# Altium PCB IMX6.PcbDoc (part 3 of 3)
Units mil, origin at the board's own origin, x right, y up, seen from the top; angles counter-clockwise.
Board outline 7950 x 5550 mil, 4 copper layers (Top Layer, GND, VCC, Bottom Layer), stack 30.634 mil thick; 256 components, 328 nets, 1056 pads, 386 vias.
Unrouted connection lines stored in the file: 1.
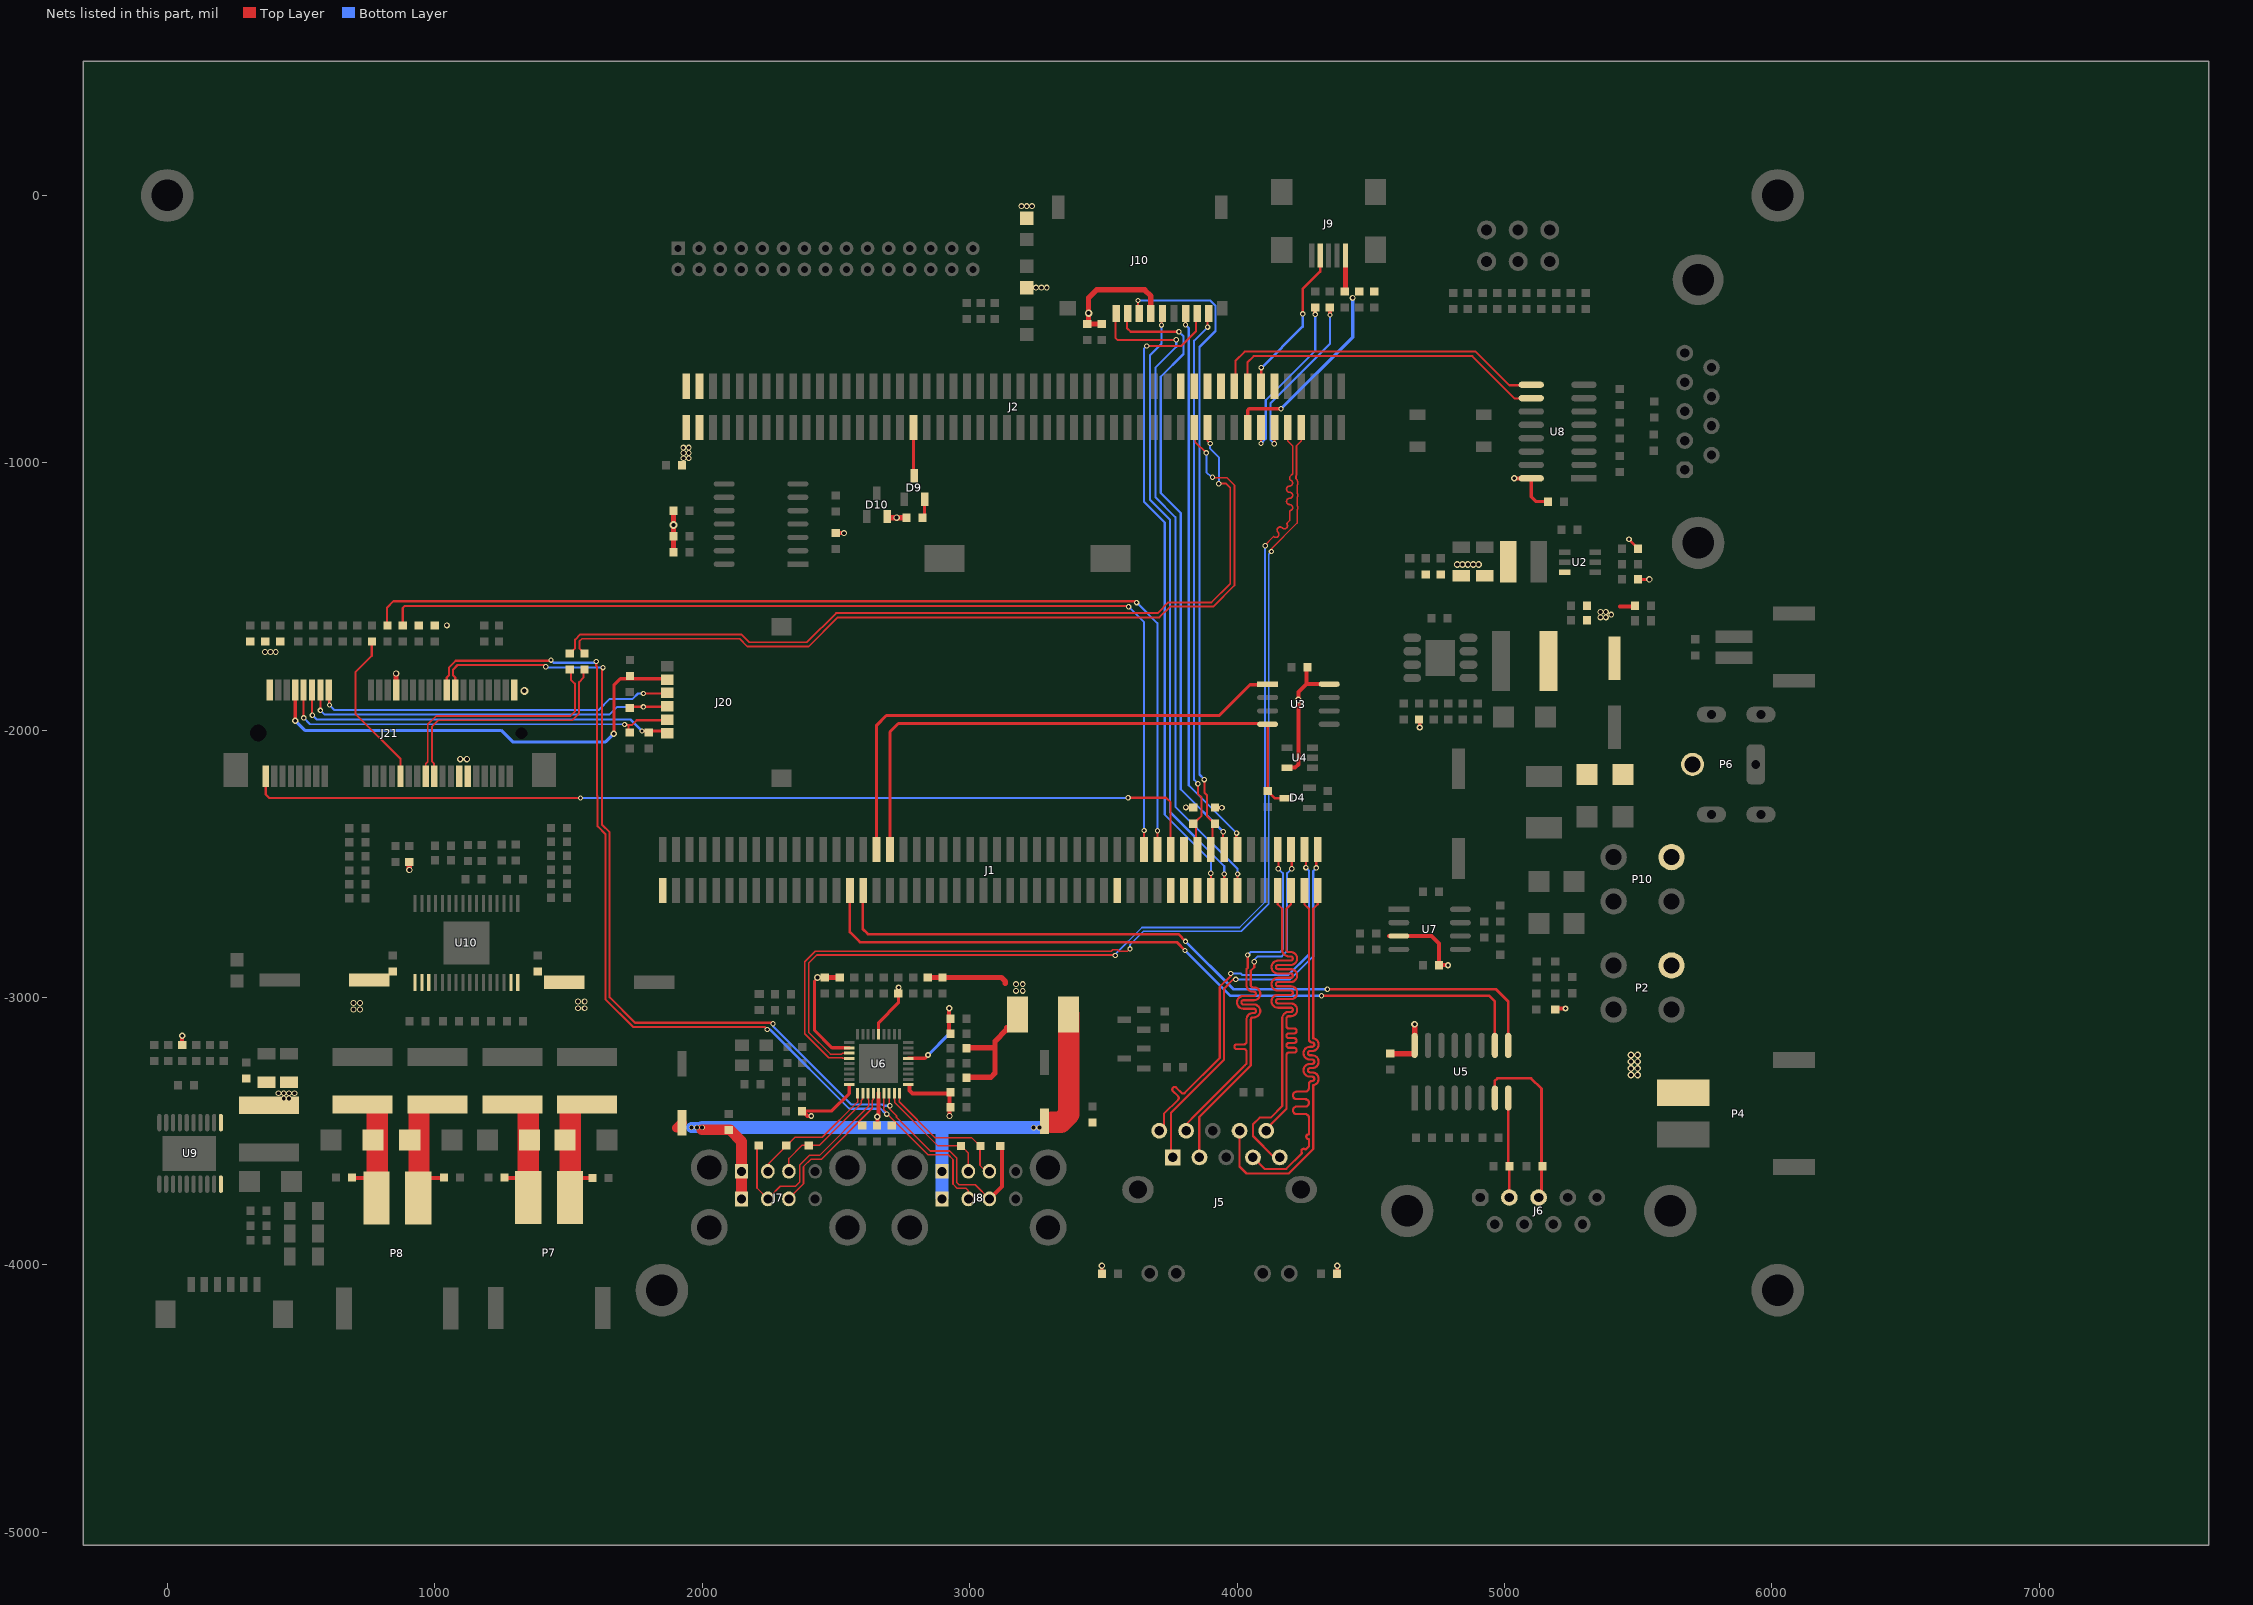
[diagram p5: the nets of this part, all layers, seen from the top]

## Via types
v1: diameter 20, hole 12, Top Layer to Bottom Layer, 137 vias
v2: diameter 22, hole 14, Top Layer to Bottom Layer, 44 vias
v3: diameter 23, hole 13, Top Layer to Bottom Layer, 35 vias
v4: diameter 24, hole 14, Top Layer to Bottom Layer, 34 vias
v5: diameter 25, hole 14, Top Layer to Bottom Layer, 26 vias
v6: diameter 22, hole 13, Top Layer to Bottom Layer, 22 vias
v7: diameter 22, hole 12, Top Layer to Bottom Layer, 19 vias
v8: diameter 30, hole 22, Top Layer to Bottom Layer, tented top, 15 vias
v9: diameter 25, hole 15, Top Layer to Bottom Layer, 11 vias
v10: diameter 22, hole 18, Top Layer to Bottom Layer, 6 vias
v11: diameter 25, hole 16, Top Layer to Bottom Layer, 5 vias
v12: diameter 24, hole 13, Top Layer to Bottom Layer, 5 vias
v13: diameter 20, hole 15, Top Layer to Bottom Layer, 5 vias
v14: diameter 26, hole 15, Top Layer to Bottom Layer, 4 vias
v15: diameter 18, hole 10, Top Layer to Bottom Layer, 4 vias
v16: diameter 20, hole 14, Top Layer to Bottom Layer, 4 vias
v17: diameter 28, hole 16, Top Layer to Bottom Layer, 3 vias
v18: diameter 28, hole 15, Top Layer to Bottom Layer, 2 vias
v19: diameter 30, hole 15, Top Layer to Bottom Layer, 2 vias
v20: diameter 32, hole 16, Top Layer to Bottom Layer, 1 vias
v21: diameter 26, hole 14, Top Layer to Bottom Layer, 1 vias
v22: diameter 30, hole 16, Top Layer to Bottom Layer, 1 vias

## Nets (pads, with @x,y where several pads share a name; then routed paths per layer and width w, separated by ;. In a path a pad name is that pad's centre, name@x,y a point inside that pad or via, vN(x,y) a via of type N, cw(c..) or ccw(c..) an arc to the next point about the centre after c; other vN are vias at no path point) (continued)
PCIE_RXO_P: C117.2 J21.25 | length 576.3
  Top Layer w8: C117.2@763.48,-1668 763.48,-1722 702.48,-1783 702.48,-1939 871.48,-2108 J21.25@871.48,-2149
PCIE_TX_N: C118.1 J2.79 | length 3256.5
  Top Layer w7: C118.1@1504.48,-1713 1523.98,-1693.5 1523.98,-1661.37 1543.35,-1642 2146.11,-1642 2175.11,-1671 2391.48,-1671 2500.48,-1562 3702.85,-1562 3742.85,-1522 3904.48,-1522 3974.48,-1452 3974.48,-1093 3959.48,-1078 v1(3931.48,-1078) ; J2.79@3889.8,-867.49 3889.8,-918.73 3899.06,-928 v1(3899.48,-928)
  Bottom Layer w7: v1(3899.48,-928) 3899.48,-946.89 3932.32,-979.73 v1@3932.32,-1077
PCIE_TX_P: C119.1 J2.77 | length 3300.3
  Top Layer w7: C119.1@1559.48,-1713 1539.98,-1693.5 1539.98,-1668 1549.98,-1658 2139.48,-1658 2168.48,-1687 2398.11,-1687 2507.11,-1578 3709.48,-1578 3749.48,-1538 3911.11,-1538 3990.48,-1458.63 3990.48,-1084 3962.48,-1056 v1@3902.48,-1056 ; J2.77@3839.8,-867.49 3843.8,-871.49 3843.8,-922.31 v1(3884.48,-963)
  Bottom Layer w7: v1(3884.48,-963) 3885.48,-964 3885.48,-1035.31 v1@3903.17,-1053
  other v1: 3908.48,-1054
PCIE_TXO_N: C118.2 J21.31 | length 922.6
  Top Layer w7: J21.31@965.47,-2169.42 965.47,-2126.05 973.21,-2118.3 973.21,-1978.64 1004.85,-1947 1506.85,-1947 1523.17,-1930.69 1523.17,-1825.69 1508.48,-1811 C118.2@1508.48,-1778
PCIE_TXO_P: C119.2 J21.33 | length 919.2
  Top Layer w7: J21.33@996.96,-2169.42 996.96,-2126.05 989.21,-2118.3 989.21,-1985.27 1011.48,-1963 1513.48,-1963 1539.17,-1937.31 1539.17,-1820.31 1555.48,-1804 C119.2@1555.48,-1782
POR_B: D9.3 J2.35 | length 187.5
  Top Layer w12: D9.3@2789.8,-1055 J2.35@2789.8,-867.49
PWM1_OUT: J1.1
RESET_B: D9.2 R93.1 | length 61.1
  Top Layer w12: R93.1@2830.48,-1205 D9.2@2830.48,-1143.89
SATA_RX_N: J2.82
SATA_RX_P: J2.80
SATA_TX_N: J2.76
SATA_TX_P: J2.78
SD2_CD: J1.82 J10.9 R36.1 | length 2036.3
  Top Layer w8: J1.82@3846,-2448.02 R36.1@3846,-2351.8 ; R36.1@3849.48,-2338 3867.48,-2320 3867.48,-2252 3853.48,-2238 v1(3853.48,-2200) ; v1(3889.98,-492.5) J10.9@3889.98,-437.89
  Bottom Layer w8: v1(3853.48,-2200) 3839.48,-2186 3839.48,-543 v1(3889.98,-492.5)
SD2_CLK: J1.85 J10.5 | length 2295.4
  Top Layer w8: v1(3717.48,-485) J10.5@3717.48,-437.17 ; J1.85@3952,-2599.77 v1(3952,-2538)
  Bottom Layer w8: v1(3717.48,-485) 3717.48,-555 3674.48,-598 3674.48,-1138 3749.48,-1213 3749.48,-2306 3952,-2508.52 v1(3952,-2538)
SD2_CMD: J1.84 J10.3 R35.1 | length 2413.6
  Top Layer w8: J10.3@3627.48,-432.72 3629.48,-430.72 v1(3629.48,-393) ; v1@3878.48,-2187 3878.48,-2234 3887.48,-2243 3887.48,-2322 3908,-2342.52 J1.84@3908,-2445.23
  Bottom Layer w8: v1(3629.48,-393) 3899.48,-393 3919.48,-413 3919.48,-507 3859.48,-567 3859.48,-2166 3877.48,-2184 v1(3877.48,-2185)
SD2_DATA0: J1.88 J10.7 | length 2089.9
  Top Layer w8: J10.7@3804.62,-436.64 3807.48,-439.5 v1(3807.48,-484) ; J1.88@3997,-2441.23 v1@3997,-2380
  Bottom Layer w8: v1(3807.48,-484) 3819.48,-496 3819.48,-2206 v1(3998.48,-2385)
SD2_DATA1: J1.83 J10.8 | length 2400.9
  Top Layer w8: v1(3662.48,-563) 3791.48,-563 3846.48,-508 J10.8@3846.48,-459 ; J1.83@3902,-2599.77 v1(3902,-2535.52)
  Bottom Layer w8: v1(3662.48,-563) 3651.48,-574 3651.48,-1145 3729.48,-1223 3729.48,-2316 3902,-2488.52 v1(3902,-2535.52)
SD2_DATA2: J1.87 J10.1 | length 2546
  Top Layer w8: J10.1@3544.78,-436.64 3544.78,-532.3 3552.48,-540 v1(3772.48,-540) ; J1.87@4002,-2599.77 v1(4002,-2538)
  Bottom Layer w8: v1(3772.48,-540) 3772.48,-565.87 3694.48,-643.87 3694.48,-1128 3769.48,-1203 3769.48,-2286 4002,-2518.52 v1(4002,-2538)
SD2_DATA3: J1.86 J10.2 | length 2338.3
  Top Layer w8: J10.2@3588.09,-436.64 3588.09,-495.61 3602.48,-510 v1(3782.48,-510) ; J1.86@3947,-2446.23 v1@3947,-2380
  Bottom Layer w8: v1(3782.48,-510) 3799.48,-527 3799.48,-593 3714.48,-678 3714.48,-1113 3789.48,-1188 3789.48,-2221 v1@3950.98,-2382.5
  other v1: 3948.48,-2380
SD3_CMD: J1.77
SD3_DATA0: J1.80
SD3_DATA1: J1.74 R105.1 | length 3692.2
  Top Layer w8: R105.1@879.48,-1608 879.48,-1543 887.48,-1535 3591.48,-1535 v1@3598.48,-1542 ; J1.74@3652.48,-2415 v1@3652.48,-2374
  Bottom Layer w8: v1(3594.48,-1538) 3652.48,-1596 v1(3652.48,-2375)
SD3_DATA2: J1.76 R104.1 | length 3799.4
  Top Layer w8: R104.1@820.48,-1608 820.48,-1542 844.48,-1518 v1@3619.48,-1518 ; J1.76@3702.48,-2416 v1@3702.48,-2375
  Bottom Layer w8: v1@3625.98,-1523.5 3701.98,-1599.5 v1@3701.98,-2375.5
  other v1: 3702.48,-2376 3624.48,-1523
SD3_DATA4: J1.79
SD3_DATA5: J1.78 J21.1 | length 3610.4
  Top Layer w8: J21.1@367.04,-2182 367.04,-2240.56 380.04,-2253.56 v1(1544.48,-2253.56) ; v1(3592.48,-2253) 3734.48,-2253 3751.48,-2270 J1.78@3751.48,-2424
  Bottom Layer w8: v1(1544.48,-2253.56) v1@3593.48,-2253.56
SD3_DATA6: J1.81
SD3_DATA7: J1.69
SPEAK1+: C76.2 D14.K L9.2 P8.1 | length 402
  Top Layer w15: P8.1@975,-3675 C76.2@1037,-3675
  Top Layer w80: P8.1@940.39,-3748 L9.2@940.39,-3408
SPEAK1-: C80.1 D15.K L10.2 P8.2 | length 381
  Top Layer w15: C80.1@695,-3675 P8.2@766,-3675
  Top Layer w80: P8.2@784.48,-3718 L10.2@784.48,-3408
SPEAK2+: C70.2 D12.K L7.2 P7.1 | length 372
  Top Layer w15: P7.1@1528,-3675 C70.2@1590,-3675
  Top Layer w80: P7.1@1505.39,-3718 L7.2@1505.39,-3408
SPEAK2-: C72.1 D13.K L8.2 P7.2 | length 368
  Top Layer w15: C72.1@1265,-3675 P7.2@1328,-3675
  Top Layer w80: P7.2@1349.48,-3718 L8.2@1349.48,-3413
TRX0_N: J1.100 J5.2 | length 1485.5
  Top Layer w8: J5.2@3752.48,-3591 3752.48,-3431.63 3951.48,-3232.63 3951.48,-2966.81 3986.29,-2932 v1(3995.48,-2932) ; v1(4296.48,-2515) J1.100@4296.48,-2455.23
  Bottom Layer w8: v1(3995.48,-2932) 4198.61,-2932 4284.98,-2845.63 4284.98,-2526.5 v1(4296.48,-2515)
TRX0_P: J1.98 J5.1 | length 1478.4
  Top Layer w8: J5.1@3726.48,-3498 3726.48,-3435 3779.48,-3382 ccw(c3773.12,-3375.64) 3779.48,-3369.27 3760.3,-3350.09 cw(c3766.66,-3343.73) 3760.3,-3337.36 cw(c3766.66,-3343.73) 3773.03,-3337.36 3792.21,-3356.54 ccw(c3798.57,-3350.18) 3804.94,-3356.54 3935.48,-3226 3935.48,-2960.19 3976.48,-2919.19 v1(3976.48,-2910) ; v1@4257.42,-2514.74 J1.98@4257.42,-2461
  Bottom Layer w8: v1(3976.48,-2910) 4013.48,-2910 4019.48,-2916 4191.98,-2916 4268.98,-2839 4268.98,-2525.5 v1@4256.98,-2513.5 ; v1@4256.48,-2514 v1(4257.48,-2514)
TRX1_N: J1.96 J5.4 | length 1506.9
  Top Layer w8: J5.4@3859.48,-3598 3858.48,-3597 3858.48,-3447 4051.48,-3254 4051.48,-3082 cw(c4059.48,-3082) 4059.48,-3074 4062.95,-3074 ccw(c4062.95,-3050) 4086.95,-3050 ccw(c4062.95,-3050) 4062.95,-3026 4024.01,-3026 cw(c4024.01,-3018) 4024.01,-3010 4062.95,-3010 ccw(c4062.95,-2986) 4086.95,-2986 ccw(c4062.95,-2986) 4062.95,-2962 4059.48,-2962 cw(c4059.48,-2954) 4051.48,-2954 4051.48,-2900 4064.48,-2887 v1(4064.48,-2866) ; J1.96@4202,-2446.23 4204.48,-2448.71 v1(4204.48,-2518)
  Bottom Layer w8: v1(4064.48,-2866) 4064.48,-2859 4077.48,-2846 4167.11,-2846 4187.48,-2825.63 4187.48,-2535 v1(4204.48,-2518)
TRX1_P: J1.94 J5.3 | length 1510
  Top Layer w8: J5.3@3809.48,-3498 3809.48,-3473.37 3847.17,-3435.69 4020.67,-3262.19 4029.12,-3253.74 4035.48,-3247.37 4035.48,-3202 ccw(c4026.48,-3202) 4026.48,-3193 3999.07,-3193 cw(c3999.07,-3184) 3990.07,-3184 cw(c3999.07,-3184) 3999.07,-3175 4026.48,-3175 ccw(c4026.48,-3166) 4035.48,-3166 4035.48,-3157 4035.48,-3148 4035.48,-3082 cw(c4059.48,-3082) 4059.48,-3058 4062.95,-3058 ccw(c4062.95,-3050) 4070.95,-3050 ccw(c4062.95,-3050) 4062.95,-3042 4024.01,-3042 cw(c4024.01,-3018) 4024.01,-2994 4062.95,-2994 ccw(c4062.95,-2986) 4070.95,-2986 ccw(c4062.95,-2986) 4062.95,-2978 4059.48,-2978 cw(c4059.48,-2954) 4035.48,-2954 4035.48,-2893.37 4040.17,-2888.69 4040.17,-2841.69 v1(4039.48,-2841) ; J1.94@4152,-2446.23 4154.48,-2448.71 v1(4154.48,-2518) v1@4152.53,-2518
  Bottom Layer w8: v1(4039.48,-2841) 4050.48,-2830 4160.48,-2830 4171.48,-2819 4171.48,-2535 v1(4154.48,-2518)
TRX2_N: J1.97 J5.8 | length 1572.1
  Top Layer w8: J5.8@4059.48,-3598 4102.48,-3641 4184.48,-3641 4243.14,-3582.34 ccw(c4242.43,-3581.64) 4243.14,-3580.93 cw(c4249.5,-3574.57) 4243.14,-3568.2 cw(c4249.5,-3574.57) 4255.87,-3568.2 ccw(c4256.57,-3567.49) 4257.28,-3568.2 4269,-3556.48 4269,-3530.48 ccw(c4268,-3530.48) 4268,-3529.48 cw(c4268,-3520.48) 4259,-3520.48 cw(c4268,-3520.48) 4268,-3511.48 ccw(c4268,-3510.48) 4269,-3510.48 4269,-3450 ccw(c4255,-3450) 4255,-3436 4223,-3436 cw(c4223,-3422) 4209,-3422 cw(c4223,-3422) 4223,-3408 4255,-3408 ccw(c4255,-3394) 4269,-3394 ccw(c4255,-3394) 4255,-3380 4223,-3380 cw(c4223,-3366) 4209,-3366 cw(c4223,-3366) 4223,-3352 4255,-3352 ccw(c4255,-3338) 4269,-3338 4269,-3324 cw(c4281,-3324) 4281,-3312 ccw(c4281,-3304) 4289,-3304 ccw(c4281,-3304) 4281,-3296 4273,-3296 cw(c4273,-3272) 4273,-3248 4281,-3248 ccw(c4281,-3240) 4289,-3240 ccw(c4281,-3240) 4281,-3232 4273,-3232 cw(c4273,-3208) 4273,-3184 4281,-3184 ccw(c4281,-3176) 4289,-3176 ccw(c4281,-3176) 4281,-3168 cw(c4281,-3156) 4269,-3156 4269,-2800.6 ; J1.97@4252,-2599.77 4252,-2651.02 4269,-2668.02 4269,-2804
TRX2_P: J1.99 J5.7 | length 1554.4
  Top Layer w8: J5.7@4009.48,-3504 4009.48,-3632 4035.48,-3658 4193.48,-3658 4285,-3566.48 4285,-3327.66 ccw(c4281,-3304) 4305,-3304 ccw(c4281,-3304) 4281,-3280 4273,-3280 cw(c4273,-3272) 4273,-3264 4281,-3264 ccw(c4281,-3240) 4305,-3240 ccw(c4281,-3240) 4281,-3216 4273,-3216 cw(c4273,-3208) 4273,-3200 4281,-3200 ccw(c4281,-3176) 4305,-3176 ccw(c4281,-3176) 4285,-3152.34 4285,-2800.6 ; 4285,-2804 4285,-2668.02 4302,-2651.02 J1.99@4302,-2599.77
TRX3_N: J1.93 J5.10 | length 1568.3
  Top Layer w8: J5.10@4145.48,-3600 4141.48,-3600 4059.48,-3518 4059.48,-3474 4084.48,-3449 4125.48,-3449 4169,-3405.48 4169,-3078 cw(c4193,-3078) 4193,-3054 4200.89,-3054 ccw(c4200.89,-3046) 4208.89,-3046 ccw(c4200.89,-3046) 4200.89,-3038 4153.11,-3038 cw(c4153.11,-3014) 4153.11,-2990 4200.89,-2990 ccw(c4200.89,-2982) 4208.89,-2982 ccw(c4200.89,-2982) 4200.89,-2974 4153.11,-2974 cw(c4153.11,-2950) 4153.11,-2926 4200.89,-2926 ccw(c4200.89,-2918) 4208.89,-2918 ccw(c4200.89,-2918) 4200.89,-2910 4153.11,-2910 cw(c4153.11,-2886) 4153.11,-2862 4200.89,-2862 ccw(c4200.89,-2854) 4208.89,-2854 ccw(c4200.89,-2854) 4200.89,-2846 4193,-2846 cw(c4193,-2822) 4169,-2822 4169,-2668.02 4152,-2651.02 J1.93@4152,-2599.77
  Bottom Layer w8: J5.10@4159.48,-3598 J5.10@4164.48,-3598
TRX3_P: J1.95 J5.9 | length 1564.3
  Top Layer w8: J5.9@4106.48,-3494 4185,-3415.48 4185,-3276 4185,-3215 cw(c4194,-3215) 4194,-3206 4213.8,-3206 ccw(c4213.8,-3197) 4222.8,-3197 ccw(c4213.8,-3197) 4213.8,-3188 4194,-3188 cw(c4194,-3179) 4185,-3179 cw(c4194,-3179) 4194,-3170 4213.8,-3170 ccw(c4213.8,-3161) 4222.8,-3161 ccw(c4213.8,-3161) 4213.8,-3152 4194,-3152 cw(c4194,-3143) 4185,-3143 cw(c4194,-3143) 4194,-3134 4213.8,-3134 ccw(c4213.8,-3125) 4222.8,-3125 ccw(c4213.8,-3125) 4213.8,-3116 4194,-3116 cw(c4194,-3107) 4185,-3107 4185,-3078 cw(c4193,-3078) 4193,-3070 4200.89,-3070 ccw(c4200.89,-3046) 4224.89,-3046 ccw(c4200.89,-3046) 4200.89,-3022 4153.11,-3022 cw(c4153.11,-3014) 4153.11,-3006 4200.89,-3006 ccw(c4200.89,-2982) 4224.89,-2982 ccw(c4200.89,-2982) 4200.89,-2958 4153.11,-2958 cw(c4153.11,-2950) 4153.11,-2942 4200.89,-2942 ccw(c4200.89,-2918) 4224.89,-2918 ccw(c4200.89,-2918) 4200.89,-2894 4153.11,-2894 cw(c4153.11,-2886) 4153.11,-2878 4200.89,-2878 ccw(c4200.89,-2854) 4224.89,-2854 ccw(c4200.89,-2854) 4200.89,-2830 4193,-2830 cw(c4193,-2822) 4185,-2822 4185,-2668.02 4202,-2651.02 J1.95@4202,-2599.77
  Bottom Layer w8: J5.9@4109.48,-3499.47 J5.9@4109.48,-3498
U2_RXD: D20.1 J6.2 U5.8 | length 390.3
  Top Layer w10: D20.1@5014.39,-3629 U5.8@5014.39,-3375.76 ; D20.1@5018.39,-3630.91 5018.39,-3747.75 J6.2@5018.65,-3748 J6.2@5018.65,-3728.17
U2_TXD: D21.1 J6.3 U5.7 | length 631.7
  Top Layer w10: U5.7@4963.48,-3355 4963.48,-3313 4974.48,-3302 5099.48,-3302 5138.48,-3341 J6.3@5138.48,-3735
UART1_RX: J2.84 U8.9 | length 1277.5
  Top Layer w8: J2.84@3989.8,-713.94 3994.48,-718.63 3994.48,-618 4028.48,-584 4892.48,-584 5018.48,-710 U8.9@5098.48,-710
UART1_TX: J2.86 U8.10 | length 1227.9
  Top Layer w8: J2.86@4039.8,-713.94 4038.48,-715.26 4038.48,-625 4062.48,-601 4879.48,-601 5038.48,-760 U8.10@5098.48,-760
UART2_RX: J1.31 U5.9 | length 2834.9
  Top Layer w10: J1.31@2600,-2599.77 2600,-2743.52 2619.48,-2763 3780.48,-2763 v1(3807.48,-2790) ; v1(4338,-2969) 4969,-2969 5014.39,-3014.39 U5.9@5014.39,-3178.91
  Bottom Layer w10: v1(3807.48,-2790) 3986.48,-2969 v1(4338,-2969)
UART2_TX: J1.29 U5.10 | length 2840.2
  Top Layer w10: J1.29@2552,-2599.48 2552,-2755.52 2589.48,-2793 3774.48,-2793 v1(3805.48,-2824) ; v1@4315,-2993 4943,-2993 4964.39,-3014.39 U5.10@4964.39,-3178.91
  Bottom Layer w10: v1(3805.48,-2824) 3974.48,-2993 v1@4315,-2993
  other v1: 4316,-2993
UART3_RX: J1.34 U3.1 | length 1984
  Top Layer w12: J1.34@2652,-2446.23 2652,-1981.48 2688.48,-1945 3933.48,-1945 4048.48,-1830 U3.1@4108.48,-1830
UART3_TX: D4.3 J1.36 R18.2 U3.4 | length 2170
  Top Layer w10: U3.4@4114.48,-1978 R18.2@4114.48,-2228 4140.54,-2254.06 D4.3@4183.43,-2254.06
  Top Layer w12: J1.36@2702,-2446.23 2702,-2006.48 2733.48,-1975 U3.4@4089.48,-1975
UIM_CLK: D31.1 J20.6 J21.12 | length 1469
  Top Layer w8: v1@540.48,-1946 J21.12@540.48,-1831.36 ; J20.6@1863.92,-2003 J20.6@1868.92,-2008
  Top Layer w10: v1(1774.48,-2003) J20.6@1863.92,-2003
  Bottom Layer w8: v1@541.48,-1943 558.48,-1960 1731.48,-1960 v1(1774.48,-2003)
  other v1: 541.48,-1944
UIM_DATA: D30.2 J20.5 J21.10 | length 1493.1
  Top Layer w8: v1@508.48,-1957 J21.10@508.48,-1861.36 ; v1@1709.65,-1980.17 1737.31,-1980.17 1754.48,-1963 J20.5@1862.48,-1963 ; D30.2@1723.57,-2007.91 1723.57,-1981.08
  Bottom Layer w8: v1(509.48,-1954) 532.73,-1977.29 v1@1710.48,-1978.37
  other v1: 1709.48,-1979
UIM_PWR: C1.1 J20.2 J21.8 | length 1753.1
  Top Layer w8: J21.8@475.48,-1840 J21.8@475.71,-1846.64
  Top Layer w12: v12@477.48,-1966 J21.8@477.48,-1842 ; v12@1669.48,-2005 1669.48,-1832 1693.48,-1808 J20.2@1868.92,-1808
  Bottom Layer w12: v12(477.48,-1965) 513.48,-2001 1247.48,-2001 1290.48,-2044 1638.2,-2044 v12@1671.2,-2011
  other v12: 1669.48,-2013
UIM_RESET: D32.1 J20.4 J21.14 | length 1470.2
  Top Layer w8: v1@571.48,-1928 J21.14@571.48,-1824.36
  Top Layer w10: D32.1@1728.57,-1913 J20.4@1872.48,-1913
  Bottom Layer w8: v1(571.48,-1926) 587.48,-1942 1652.48,-1942 1681.48,-1913 v1@1775.48,-1913
  other v1: 1779.48,-1913
UIM_VPP: J20.3 J21.16 | length 1356.8
  Top Layer w8: v1@604.48,-1906 J21.16@604.48,-1825.36 ; v1(1779.48,-1863) J20.3@1858.48,-1863
  Bottom Layer w8: v1@606.48,-1907 624.48,-1925 1611.48,-1925 1653.48,-1883 1739.48,-1883 1759.48,-1863 v1@1770.48,-1863
  other v1: 605.48,-1906
USB_H1_D_N: J2.91 U6.30 | length 4188.4
  Top Layer w6: U6.30@2549.24,-3207.72 2525.56,-3207.72 2521.72,-3211.57 2479.05,-3211.57 2397.48,-3130 2397.48,-2872 2428.48,-2841 3535.17,-2841 3538.82,-2837.34 v1(3544.48,-2843) ; v1(4105.48,-1310) 4105.48,-1309 4104.48,-1308 4136.69,-1275.79 ccw(c4144.82,-1267.66) 4152.95,-1259.53 cw(c4161.09,-1251.4) 4169.22,-1243.26 ccw(c4177.35,-1235.13) 4185.48,-1227 4196.48,-1216 4196.48,-1179 ccw(c4196.48,-1167.5) 4196.48,-1156 cw(c4196.48,-1144.5) 4196.48,-1133 ccw(c4196.48,-1121.5) 4196.48,-1110 cw(c4196.48,-1098.5) 4196.48,-1087 ccw(c4196.48,-1075.5) 4196.48,-1064 4196.48,-1053 4208.48,-1041 4208.48,-937.42 4189.8,-918.73 J2.91@4189.8,-867.49
  Bottom Layer w6: v1(3544.48,-2843) 3544.48,-2838 3644.48,-2738 4009.48,-2738 4104.48,-2643 v1@4104.48,-1308
USB_H1_D_P: J2.93 U6.31 | length 4152.3
  Top Layer w6: U6.31@2549.24,-3227.41 2525.56,-3227.41 2523.72,-3225.57 2473.25,-3225.57 2383.48,-3135.8 2383.48,-2866.2 2422.68,-2827 3529.37,-2827 3535.37,-2821 3553.59,-2821 3559.59,-2827 3590.48,-2827 v1(3599.48,-2818) ; v1(4128.48,-1332) 4128.48,-1321 4224.48,-1225 4224.48,-1179.19 4224.79,-1178.88 4224.79,-1178.35 4225.34,-1177.8 4225.34,-1175.97 4225.77,-1175.54 4225.77,-1174.83 4225.89,-1174.7 4225.89,-1173.57 4226.33,-1173.13 4226.33,-1170.21 4226.56,-1169.98 4226.56,-1165.02 4226.33,-1164.79 4226.33,-1161.87 4225.89,-1161.44 4225.89,-1160.3 4225.77,-1160.17 4225.77,-1159.46 4225.34,-1159.03 4225.34,-1157.2 4224.79,-1156.65 4224.79,-1156.12 4224.48,-1155.81 4224.48,-1133.19 4224.79,-1132.88 4224.79,-1132.35 4225.34,-1131.8 4225.34,-1129.97 4225.77,-1129.54 4225.77,-1128.83 4225.89,-1128.7 4225.89,-1127.57 4226.33,-1127.13 4226.33,-1124.21 4226.56,-1123.98 4226.56,-1119.02 4226.33,-1118.79 4226.33,-1115.87 4225.89,-1115.44 4225.89,-1114.3 4225.77,-1114.17 4225.77,-1113.46 4225.34,-1113.03 4225.34,-1111.2 4224.79,-1110.65 4224.79,-1110.12 4224.48,-1109.81 4224.48,-1087.19 4224.79,-1086.88 4224.79,-1086.35 4225.34,-1085.8 4225.34,-1083.97 4225.77,-1083.54 4225.77,-1082.83 4225.89,-1082.7 4225.89,-1081.57 4226.33,-1081.13 4226.33,-1078.21 4226.56,-1077.98 4226.56,-1073.02 4226.33,-1072.79 4226.33,-1069.87 4225.89,-1069.44 4225.89,-1068.3 4225.77,-1068.17 4225.77,-1067.46 4225.34,-1067.03 4225.34,-1065.2 4224.79,-1064.65 4224.79,-1064.12 4220.48,-1059.81 4220.48,-1048.8 4222.48,-1046.8 4222.48,-936.05 4239.8,-918.73 J2.93@4239.8,-867.49
  Bottom Layer w6: v1(3599.48,-2818) 3599.48,-2802.8 3650.28,-2752 4015.28,-2752 4118.48,-2648.8 4118.48,-1342 v1(4128.48,-1332)
USB_H1_OC: J2.90
USB_OTG_D_N: J2.89 R33.2 | length 659.6
  Top Layer w8: v1(4139.48,-928.51) J2.89@4139.48,-878
  Top Layer w15: v1(4347.48,-447) R33.2@4347.48,-420
  Bottom Layer w8: v1(4139.48,-928.51) 4124.48,-913.51 4124.48,-778 4347.48,-555 v1@4347.48,-445
USB_OTG_D_P: J2.87 R34.2 | length 642.6
  Top Layer w8: v1@4089.48,-928.51 J2.87@4089.48,-878
  Top Layer w15: v1(4292.48,-445) R34.2@4292.48,-420
  Bottom Layer w8: v1(4089.48,-928) 4107.48,-910 4107.48,-766 4292.48,-581 v1(4292.48,-445)
USB_OTG_ID: J2.88 J9.4 | length 580.2
  Top Layer w10: J2.88@4090.48,-713.26 v1(4090.48,-644) ; v1(4245.48,-443) 4245.48,-350 4310.98,-284.5 J9.4@4310.98,-225
  Bottom Layer w10: v1@4091.48,-645 4245.48,-491 v1(4245.48,-443)
USB_OTG_VBUS: C47.2 C48.2 C49.2 J2.85 J9.1 | length 850.4
  Top Layer w12: J2.85@4039.8,-867.49 4039.8,-802.69 4044.48,-798 v1(4164.48,-798)
  Top Layer w18: C48.2@4405.48,-354.01 J9.1@4405.48,-222
  Bottom Layer w12: v1(4164.48,-798) 4432.48,-530 v3@4432.48,-382
  other v3: 4432.48,-383
USB_PORT1_N: D22.1 J7.2 U6.1 | length 491.4
  Top Layer w6: J7.2@2245.11,-3649.97 2245.11,-3624.37 2346.48,-3523 2448.48,-3523 2580.74,-3390.74 U6.1@2580.74,-3357.33
USB_PORT1_P: D24.1 J7.3 U6.2 | length 446
  Top Layer w6: J7.3@2323.85,-3649.97 2323.85,-3601.63 2372.48,-3553 2438.28,-3553 2594.74,-3396.54 2594.74,-3384.74 2600.43,-3379.06 U6.2@2600.43,-3357.33 U6.2@2600.25,-3357.5
USB_PORT2_N: D23.2 J7.6 U6.3 | length 815.5
  Top Layer w6: D23.2@2210.39,-3553.09 2204.48,-3559 2204.48,-3712.49 J7.6@2245.11,-3753.12 ; J7.6@2252.98,-3744.5 2291.48,-3706 2348.48,-3706 2364.48,-3690 2364.48,-3626.37 2400.44,-3590.41 2438.07,-3590.41 2621.95,-3406.53 2621.95,-3382.86 2620.11,-3381.02 U6.3@2620.11,-3357.33
USB_PORT2_P: D25.2 J7.7 U6.4 | length 566.5
  Top Layer w6: J7.7@2312.29,-3764.81 2312.29,-3762.19 2373.48,-3701 2373.48,-3700.8 2378.48,-3695.8 2378.48,-3632.17 2406.24,-3604.41 2446.07,-3604.41 2635.95,-3414.53 2635.95,-3384.86 2639.8,-3381.02 U6.4@2639.8,-3357.33
USB_PORT3_N: D27.2 J8.6 J21.36 U6.6 | length 3774.5
  Top Layer w6: U6.6@2679.17,-3357.33 2679.17,-3419.69 2689.48,-3430 v1(2689.48,-3436) v1@2695.48,-3436 ; v1@2691.98,-3435.5 2844.48,-3588 2919.48,-3588 2937.48,-3606 2937.48,-3697.63 2953.85,-3714 2987.48,-3714 2995.11,-3721.63 J8.6@2995.11,-3753.12
  Top Layer w8: J21.36@1044.21,-1846.58 1044.21,-1803.21 1051.95,-1795.46 1051.95,-1766.37 1077.84,-1740.49 v1@1433.97,-1740.49 ; v1@1433.97,-1743 v1(1433.97,-1738) ; v1(1603.48,-1743) 1603.48,-1759.37 1606.48,-1762.37 1606.48,-2246 1608.48,-2248 1608.48,-2359.63 1637.29,-2388.44 1637.29,-3005.81 1741.67,-3110.19 2234.04,-3110.19 v1(2243.17,-3119.31) ; D27.2@2698.57,-3477.91 D27.2@2706.48,-3470.01
  Bottom Layer w8: v1(1433.97,-1738) 1443.97,-1748 v1@1602.48,-1748 ; v1(2243.17,-3119.31) 2253.17,-3119.31 2549.85,-3416 2666.85,-3416 2682.85,-3432 v1@2692.48,-3432 ; v1(2689.48,-3436) 2690.48,-3436 v1@2693.48,-3433
USB_PORT3_P: D29.2 J8.7 J21.38 U6.7 | length 3950.9
  Top Layer w6: U6.7@2698.85,-3357.33 2698.85,-3415.09 2716.72,-3433 2726.16,-3442.44 2726.16,-3447.68 2852.48,-3574 2925.28,-3574 2951.48,-3600.2 2951.48,-3691.83 2959.65,-3700 3020.73,-3700 J8.7@3073.85,-3753.12
  Top Layer w8: J21.38@1075.7,-1846.58 1075.7,-1803.21 1067.95,-1795.46 1067.95,-1773 1084.47,-1756.49 1409.97,-1756.49 1414.48,-1761 v1(1414.48,-1763) ; v1(1628.48,-1766) 1624.48,-1770 1624.48,-2353 1653.29,-2381.81 1653.29,-2999.19 1748.29,-3094.19 v1@2261.67,-3094.19 ; J8.7@3073.85,-3753.12 J8.7@3074.36,-3753.12
  Top Layer w15: J8.7@3074.36,-3753.12 3121.48,-3706 D29.2@3121.48,-3560
  Bottom Layer w8: v1@1420.48,-1766 v1(1628.48,-1766) ; v1(2264.48,-3098) 2264.48,-3108 2556.48,-3400 2673.48,-3400 2680.48,-3407 2682.48,-3405 v1(2701.48,-3405)
USB_PORT4_N: D26.1 J8.2 U6.8 | length 441.9
  Top Layer w6: U6.8@2718.54,-3357.33 2718.54,-3381.02 2720.38,-3382.86 2720.38,-3393.63 2881.75,-3555 D26.1@2966.48,-3555 ; D26.1@2978.48,-3565 2995.11,-3581.63 J8.2@2995.11,-3649.97
USB_PORT4_P: D28.1 J8.3 U6.9 | length 515.3
  Top Layer w6: U6.9@2738.22,-3357.33 2738.22,-3381.02 2736.38,-3382.86 2736.38,-3389.83 2871.55,-3525 3008.48,-3525 3038.48,-3555 3038.48,-3628 3061.48,-3651 J8.3@3067.48,-3651
VBUS: C29.1 C30.2 C36.1 C37.2 F2.2 J7.1 J7.5 J8.1 J8.5 | length 2424.6
  Top Layer w35: 1904.48,-3488 C36.1@1924.48,-3468
  Top Layer w40: v13@1998.48,-3495 2103.48,-3495 2146.68,-3538.2 J7.5@2146.68,-3753.12 J7.5@2141.57,-3748
  Top Layer w80: 3306.48,-3466 3341.48,-3466 3370.43,-3437.06 F2.2@3370.43,-3063
  Bottom Layer w30: J8.5@2896.48,-3756 J8.5@2896.5,-3753.12
  Bottom Layer w40: v13(1959.48,-3486) v13(1979.48,-3486) v13(1999.48,-3486)
  Bottom Layer w50: v13(1999.48,-3486) v13@3259.48,-3486 ; J8.5@2896.68,-3747 2896.68,-3491.8
  other v13: 3239.48,-3487 3260.48,-3487
VCC3V3: C7.2 C25.2 C32.2 C34.2 C35.2 C40.2 C41.2 C42.2 C43.2 C44.2 C50.2 C86.1 C87.1 C88.1 C109.1 C110.1 C111.1 D10.2 J10.4 J21.2 J21.24 J21.39 J21.41 J21.52 L5.2 L11.1 R9.2 R10.2 R11.2 R19.2 R24.1 R35.2 R36.2 R44.2 R57.1 R58.1 R89.1 R90.1 R93.2 R112.2 R113.2 R114.2 R115.2 U5.16 U6.5 U6.10 U6.15 U6.23 U6.29 U6.36 U8.16 | length 3036.4
  Top Layer w12: C43.2@2382.48,-3424 2484.48,-3424 2549.24,-3359.24 U6.36@2549.24,-3327 ; R19.2@2462.48,-2925 2432.48,-2925 2419.48,-2938 2419.48,-3123 2484.52,-3188.04 U6.29@2549.24,-3188.04 ; U6.23@2659.48,-3136.86 2659.48,-3094 2733.48,-3020 v7@2733.48,-2962 ; U6.15@2769.72,-3227.41 2833.07,-3227.41 v7@2844.48,-3216 ; R10.2@3494.48,-4033 v4(3494.48,-4003) ; v6(3808.48,-2289) R36.2@3834.48,-2289 ; R35.2@3917.48,-2290 v6@3945.48,-2290 ; R11.2@4374.48,-4033 v4(4374.48,-4003) ; U8.16@5100.39,-1058.09 5100.39,-1126.91 5118.48,-1145 C7.2@5163.48,-1145 ; R58.1@5498.48,-1436 v4(5542.48,-1436)
  Top Layer w15: R44.2@54.48,-3178 v4@54.48,-3145 ; C43.2@2382.48,-3432 2393.48,-3443 v7(2407.48,-3443) ; R112.2@2499.48,-1263 v2(2529.48,-1263) ; C41.2@2649.48,-3478 2654.48,-3473 v4(2654.48,-3446) 2659.48,-3441 U6.5@2659.48,-3357.33 ; U6.10@2774.48,-3330 2774.48,-3348 2785.86,-3359.38 2918.1,-3359.38 2924.48,-3353 v4(2924.48,-3443) ; v4(2923.48,-3040) 2923.48,-3132 C35.2@2924.48,-3133 ; v4@5036.48,-1058.09 U8.16@5100.39,-1058.09
  Top Layer w20: v4(854.48,-1788) 854.48,-1845.83 J21.24@855.23,-1846.58 ; v4(904.48,-2523) R57.1@904.48,-2493 ; R113.2@1892.48,-1333 R115.2@1892.48,-1179 ; R19.2@2456.48,-2925 R24.1@2513.48,-2925 ; D10.2@2695.47,-1205 R93.2@2763.48,-1205 ; C50.2@3440.48,-481 C40.2@3486.48,-481 ; C50.2@3442.48,-471 3444.48,-469 3444.48,-383 3474.48,-353 3654.48,-353 3677.7,-376.22 J10.4@3677.7,-441.64 ; C25.2@4573.48,-3210 U5.16@4661.48,-3210 ; U5.16@4664.39,-3178.91 v21(4664.39,-3100)
  Bottom Layer w12: v7(2844.48,-3215) 2923.48,-3136 v4(2923.48,-3040)
  other v2: 364.48,-1708 384.48,-1708 404.48,-1708 1044.48,-1608 3193.48,-40 3213.48,-40 3233.48,-40
  other v4: 54.48,-3143 1094.48,-2108 1119.48,-2108 2726.48,-1205 5036.48,-1058
  other v5: 2430.48,-2925
  other v6: 3943.48,-2290
  other v7: 2734.48,-2962
  other v11: 4823.48,-1380 4843.48,-1380 4863.48,-1380 4883.48,-1380 4903.48,-1380
  other v18: 3444.48,-440
  other v19: 1892.48,-1233
  other v22: 1334.48,-1853
VCC5V: C2.1 C5.1 C12.1 C17.1 C18.1 C23.1 F2.1 J2.1 J2.2 J2.3 J2.4 L1.2 L4.1 R2.2 R3.1 R4.1 R17.1 R20.1 R21.1 R22.1 R23.1 U2.3 U3.8 U4.5 U7.3 | length 1683.9
  Top Layer w10: R2.2@4682.48,-1960 R2.2@4683.48,-1961 ; v7@5465.98,-1286.5 R4.1@5500.48,-1321
  Top Layer w12: v3(4683.48,-1990) R2.2@4683.48,-1961
  Top Layer w15: 3094.44,-3188.04 3094.48,-3188 ; U4.5@4186.25,-2140.4 4216.76,-2140.4 4229.48,-2127.69 4229.48,-1858 4259.48,-1828 ; C23.1@4259.48,-1769 4259.48,-1828 ; U3.8@4344.8,-1828 4259.48,-1828 ; U7.3@4568.48,-2770 4728,-2770 4755,-2797 4755,-2870 4764,-2879 v3(4789,-2879) ; R17.1@5205,-3041 v7(5229,-3041) ; 5431.48,-1537 R3.1@5491.48,-1537
  Top Layer w20: R23.1@2838.48,-2925 3118.48,-2925 3133.48,-2940 3133.48,-2947 ; R20.1@2984.48,-3298.04 3079.44,-3298.04 3094.48,-3283 3094.48,-3164 3138.48,-3120 3138.48,-3113 ; R21.1@2999.8,-3188.04 3094.44,-3188.04
  other v2: 3173.48,-2975 3198.48,-2975 3173.48,-2950 3198.48,-2950 5359.48,-1578 5379.48,-1578 5399.48,-1568 5359.48,-1558 5379.48,-1558 1929.48,-983 1949.48,-983 1929.48,-963 1949.48,-963 3248.48,-345 3268.48,-345 3288.48,-345
  other v5: 4229.48,-1887
  other v6: 1929.48,-943 1949.48,-943
  other v7: 5466.48,-1286
VIN: C57.1 C58.2 C59.2 C65.1 C66.1 C83.1 C84.1 D1.K D2.A L6.1 P2.4 P4.1 P6.2 P10.4 U9.1 U9.20 U10.17 U10.18 U10.19 U10.31 U10.32
  other v2: 434.48,-3378 454.48,-3378 414.48,-3358 434.48,-3358 454.48,-3358 474.48,-3358 695,-3045 720,-3045 1535,-3040 1560,-3040 695,-3020 720,-3020 1535,-3015 1560,-3015
  other v9: 5473.48,-3290 5498.48,-3290 5473.48,-3265 5498.48,-3265 5473.48,-3240 5498.48,-3240 5473.48,-3215 5498.48,-3215
pads on no net: D4.2 D9.1 J3.1 J3.4 J3.6 J3.7 J3.8 J3.9 J6.1 J6.4 J6.6 J6.7 J6.8 J6.9 J20. J21.3 J21.5 J21.7 J21.17 J21.19 J21.42 J21.44 J21.45 J21.46 J21.47 J21.49 J21.51 J21.53 J21.54 J21.55 J21.56 U1.3 U4.1 U5.11 U5.12 U5.13 U5.14 U6.12 U6.16 U6.18 U6.20 U7.5 U8.11 U8.12 U8.13 U8.14 U9.5 U9.8 U9.19 U10.16 U25.1 U25.3 U25.4 U25.7 U25.8 U25.9 U25.14
copper on no net: | length 761.4
  Top Layer w35: 1518.48,-1235 1568.48,-1285 ; 1568.48,-665 1568.48,-1285 ; 1618.48,-1235 1568.48,-1285

## Polygon pours and split planes (outlines as drawn)
GND on Top Layer "Top Layer-No Net 1" (solid, remove dead copper, pour order 1001): 4300,-1200 6500,-1200 6540,-1160 6420,-1280 6420,-4440 4300,-4440
EARTH on Top Layer "Top Layer-No Net 1" (solid, remove dead copper, pour order 1000): 5600,-160 5600,-420 5940,-420 5940,-1180 5620,-1180 5620,-1420 5980,-1420 6020,-1420 6020,-3660 6260,-3660 6360,-3760 6420,-3700 6420,-140
EARTH on Top Layer "EARTH_L01_P098" (solid, remove dead copper, pour order 98): 2858.48,-3820 3278.48,-3820 3278.48,-4120 3258.48,-4140 3218.48,-4100 2838.48,-4100
EARTH on Top Layer "EARTH_L01_P096" (solid, remove dead copper, pour order 96): 3198.48,-3540 3538.48,-3540 3538.48,-3660 4538.48,-3660 4538.48,-4300 3238.48,-4300 3198.48,-4260
EARTH on Top Layer "EARTH_L01_P084" (solid, remove dead copper, pour order 84): 3298.48,-450 3298.48,165 6268.48,165 6268.48,-225 4723.48,-225 4108.48,-225 4093.48,-240 4093.48,-450
EARTH on Top Layer "EARTH_L01_P040" (solid, remove dead copper, pour order 40): 5529.48,-3658 6169.48,-3658 6169.48,-4198 6109.48,-4258 5489.48,-4258 5489.48,-3658
EARTH on Top Layer "EARTH_L01_P026" (solid, remove dead copper, pour order 26): 2469.48,-3618 2469.48,-4258 2889.48,-4258 3269.48,-4258 3269.48,-3998 2869.48,-3998 2869.48,-3818 2849.48,-3778 2849.48,-3758 2849.48,-3618
EARTH on Top Layer "EARTH_L01_P016" (solid, remove dead copper, pour order 16): 5489.48,-3958 5489.48,-4258 4489.48,-4258 4489.48,-3938 4489.48,-3678 4809.48,-3678 4809.48,-3958 4829.48,-3978 5529.48,-3978
EARTH on Bottom Layer "Top Layer-No Net 1" (solid, remove dead copper, pour order 1002): 5500,200 5500,-440 5900,-440 5900,-1180 5600,-1180 5600,-1420 6340,-1420 6360,-1400 6360,220
EARTH on Bottom Layer "EARTH_L04_P076" (solid, remove dead copper, pour order 76): 5478.48,-3660 6218.48,-3660 6218.48,-4260 6178.48,-4300 5478.48,-4300
EARTH on Bottom Layer "EARTH_L04_P074" (solid, remove dead copper, pour order 74): 3438.48,-3680 4778.48,-3680 4798.48,-3700 4798.48,-4320 3418.48,-4320
EARTH on Bottom Layer "EARTH_L04_P072" (solid, remove dead copper, pour order 72): 3198.48,-3540 3458.48,-3540 3458.48,-4260 3438.48,-4280 2778.48,-4280 2778.48,-3820 3198.48,-3820
EARTH on Bottom Layer "EARTH_L04_P070" (solid, remove dead copper, pour order 70): 2078.48,-3800 2458.48,-3800 2458.48,-3580 2478.48,-3560 2838.48,-3560 2858.48,-3580 2858.48,-4320 2058.48,-4320 2038.48,-4300
EARTH on Bottom Layer "EARTH_L04_P066" (solid, remove dead copper, pour order 66): 1698.48,-3560 2098.48,-3560 2098.48,-4260 1698.48,-4260
AUGND on GND (split plane): 1825.4,-2398.96 1825.4,-3619.24 1675.72,-3768.92 258.24,-3768.92 223.56,-3734.24 223.56,-2906.76 238.24,-2892.08 574.48,-2892.08 576.83,-2891.77 579.02,-2890.86 580.9,-2889.42 620.9,-2849.42 622.34,-2847.54 623.25,-2845.35 623.56,-2843 623.56,-2376.76 663.24,-2337.08 1763.52,-2337.08
GND on GND (split plane): 7614.38,-5027.9 -295.42,-5027.9 -295.42,481.9 7614.38,481.9
VCC5V on VCC (split plane): 3349.4,-313.76 3349.4,-450 3349.71,-452.35 3350.62,-454.54 3352.06,-456.42 3377.06,-481.42 3378.94,-482.86 3381.13,-483.77 3383.48,-484.08 3548.48,-484.08 3550.83,-483.77 3553.02,-482.86 3554.9,-481.42 3574.9,-461.42 3576.34,-459.54 3576.98,-457.99 3577.25,-457.35 3577.56,-455 3577.56,-343.76 3587.24,-334.08 5249.72,-334.08 5485.4,-569.76 5485.4,-1698 5485.71,-1700.35 5486.4,-1702.02 5486.4,-1864 5486.4,-2303.24 5302.06,-2487.58 5300.62,-2489.46 5299.71,-2491.65 5299.4,-2494 5299.4,-3046.24 5274.72,-3070.92 5124.24,-3070.92 5072.9,-3019.58 5071.02,-3018.14 5068.83,-3017.23 5066.48,-3016.92 3073.24,-3016.92 3013.56,-2957.24 3013.56,-2678.76 3054.24,-2638.08 4067.48,-2638.08 4069.83,-2637.77 4072.02,-2636.86 4073.9,-2635.42 4124.9,-2584.42 4126.34,-2582.54 4127.25,-2580.35 4127.56,-2578 4127.56,-1886.76 4155.24,-1859.08 5136.48,-1859.08 5138.83,-1858.77 5141.02,-1857.86 5142.9,-1856.42 5177.9,-1821.42 5179.34,-1819.54 5179.98,-1817.99 5180.25,-1817.35 5180.56,-1815 5180.56,-804 5180.25,-801.65 5179.34,-799.46 5177.9,-797.58 5111.9,-731.58 5110.02,-730.14 5107.83,-729.23 5105.48,-728.92 2435.48,-728.92 2433.13,-729.23 2430.94,-730.14 2429.06,-731.58 2139.72,-1020.92 1887.24,-1020.92 1871.56,-1005.24 1871.56,-559.76 1902.24,-529.08 2958.48,-529.08 2960.83,-528.77 2963.02,-527.86 2964.9,-526.42 3187.24,-304.08 3339.72,-304.08
VIN on VCC (split plane): 2702.06,-3081.42 2703.94,-3082.86 2705.04,-3083.32 2706.13,-3083.77 2708.48,-3084.08 2934.72,-3084.08 2990.06,-3139.42 2991.94,-3140.86 2993.04,-3141.32 2994.13,-3141.77 2996.48,-3142.08 5570.72,-3142.08 5602.4,-3173.76 5602.4,-3400.24 5566.72,-3435.92 3018.24,-3435.92 2986.9,-3404.58 2985.02,-3403.14 2982.83,-3402.23 2980.48,-3401.92 600.48,-3401.92 598.13,-3402.23 595.94,-3403.14 594.06,-3404.58 556.72,-3441.92 419.24,-3441.92 378.56,-3401.24 378.56,-3023.69 430.17,-2972.08 2592.72,-2972.08
VCC3V3 on VCC (split plane): 7614.38,-5027.9 -295.42,-5027.9 -295.42,481.9 7614.38,481.9

## Keep-outs
Keep-Out Layer:
  circle w6: c4364.01,-2523 r24.02
  circle w6: c1789.99,-2523 r16.14
  circle w6: c4451.8,-790.97 r24.02
  circle w6: c1877.79,-790.72 r16.14
  lines w8: -140.52,-4208 ccw(c-70.52,-4208) -70.52,-4278 6109.48,-4278 ccw(c6106.98,-4200.5) 6184.48,-4198 6184.48,67 ccw(c6114.48,67) 6114.48,137 -75.52,137 ccw(c-75.52,72) -140.52,72 -140.52,-4208

## Other copper
Top Layer:
  rectangle net NetD2_K: 5180,-2370 5350,-2275
  rectangle net VIN: 5575,-2235 5760,-2075
  rectangle net VIN: 5545,-2540 5695,-2075
  rectangle net VIN: 5575,-2540 5915,-2375
  rectangle net AUGND: 1303,-2808 1342,-2616
  rectangle net AUGND: 952,-2798 1002,-2628
  rectangle net AUGND: 822,-2848 1407,-2743
  rectangle net GND: 2033.48,-3450 2218.48,-3375
  rectangle net GND: 2033.48,-3405 2088.48,-3285
  rectangle net EARTH: 1863.48,-3965 2098.48,-3565
  rectangle net EARTH: 3178.48,-465 3403.48,-395
  rectangle net VIN: 5570,-2955 5730,-2805
  rectangle net +12V: 4498.48,-1755 4603.48,-1675
  rectangle net NetD2_K: 5078.48,-2405 5215,-2275
  rectangle net VIN: 5263.48,-2235 5598.48,-2120
  rectangle net VIN: 5703.48,-3340 5913.48,-2465
  rectangle net VIN: 5413.48,-3410 5913.48,-3150
  rectangle net NetC11_1: 5143.48,-1400 5188.48,-1345
  rectangle net EARTH: 1745.48,-4190 2552.48,-3818
  rectangle net NetC4_1: 4766.48,-1616 5029.48,-1552
  rectangle net NetC4_1: 4842.48,-1672 5029.48,-1610
  rectangle net VCC3V3: 4799.48,-1412 4995.48,-1363
  rectangle net VCC3V3: 4677.48,-1449 5044.48,-1390
  rectangle net VCC5V: 5203.48,-1500 5275.48,-1395
  rectangle net EARTH: 614.48,-4208 2569.48,-4048
  rectangle net EARTH: -50.52,-4258 2534.48,-4163
  rectangle net EARTH: 5489.48,-3918 5829.48,-3658
  rectangle net GND: 3109.48,-3408 3214.48,-3338
  rectangle net GND: 3139.48,-3408 3224.48,-3283
  rectangle net GND: 3139.48,-3293 3299.48,-3193
  rectangle net GND: 2964.48,-3513 3134.48,-3338
  rectangle net GND: 2054.48,-3194 2158.48,-3163
  rectangle net GND: 1884.48,-3303 2089.48,-3163
  rectangle net GND: 2194.48,-3508 2408.48,-3480
  rectangle net GND: 2619.48,-3593 2679.48,-3523
  rectangle net GND: 2579.48,-3553 2714.48,-3518
  rectangle net AUGND: 1699.48,-2970 1815,-2873
  rectangle net GND: 539.48,-4003 661.48,-3762.57
  rectangle net GND: 138.48,-3158 194.48,-3083
  rectangle net GND: 139.48,-3203 284.48,-3138
  rectangle net GND: 269.48,-3263 491.88,-3138
  rectangle net GND: 1709.48,-2088 1824.01,-2048
  rectangle net GND: 1709.48,-1768 1894.48,-1720
  rectangle net GND: 589.48,-2188 634.48,-2153
  rectangle net GND: 1019.48,-2208 1069.48,-2093
  rectangle net GND: 890.48,-2208 945.48,-1920
  rectangle net VCC3V3: 1079.48,-2208 1134.48,-2093
  rectangle net VCC3V3: 919.48,-1631 1074.48,-1583
  rectangle net VCC3V3: 329.48,-1898 394.48,-1758
  rectangle net VCC3V3: 282.48,-1763 444.48,-1643
  rectangle net VCC3V3: 1294.48,-1873 1359.48,-1833
  rectangle net VCC5V: 3169.48,-373 3299.48,-313
  rectangle net NetC52_1: 2969.48,-423 3124.48,-283
  rectangle net NetC52_1: 3034.48,-293 3239.48,-173
  rectangle net NetC52_1: 2979.48,-303 3054.48,-168
  rectangle net VCC3V3: 3173.48,-98 3249.48,-19
  rectangle net VBUS: 3314.48,-3503 3484.48,-3448
  rectangle net AUGND: 1632.48,-3695 1700.48,-3580
  rectangle net AUGND: 1601.48,-3592 1699.48,-3476
  rectangle net AUGND: 1070.48,-3695 1222.48,-3584
  rectangle net AUGND: 1013.48,-3600 1244.48,-3480
  rectangle net AUGND: 948.48,-2671 1007.48,-2627
  rectangle net AUGND: 1675.48,-2493 1779.48,-2360
  rectangle net VIN: 639.48,-3065 779.48,-2953
  rectangle net VIN: 1484.48,-3060 1604.48,-2928
  rectangle net VCC5V: 3123.48,-3136 3247.54,-2930
  rectangle net VIN: 274.48,-3433 494.48,-3283
  rectangle net VIN: 189.48,-3493 504.48,-3368
  rectangle net VIN: 189.48,-3733 244.48,-3433
  rectangle net NetP5_5: 260.48,-4147 301.48,-4119
  rectangle net NetC60_2: 419.48,-4015.4 513.48,-3643
  rectangle net EARTH: 2809.48,-3798 2849.48,-3738
  rectangle net VBUS: 3279.48,-3508 3319.48,-3423
  rectangle net VBUS: 1879.48,-3518 2008.48,-3433
  rectangle net VCC5V: 5299.48,-1803 5444.48,-1487
  rectangle net VCC5V: 5132.48,-1861 5448.48,-1748
  rectangle net +12V: 4762.48,-2241 5216.48,-2101
  rectangle net NetD11_A: 274.48,-3703 339.48,-3573
  rectangle net VIN: 629.48,-2978 984.48,-2903
  rectangle net VIN: 1284.48,-2976 1608.48,-2903
  rectangle net NetR45_2: 1259.48,-2663 1284.48,-2638
  rectangle net GVDD: 1154.48,-2663 1184.48,-2623
  rectangle net GVDD: 1159.48,-2658 1184.48,-2558
  rectangle net VBUS: 3227.48,-3506 3306.48,-3466
  rectangle net GND: 224.48,-2883 294.48,-2788
  rectangle net AUGND: 214.48,-2973 520,-2908
  rectangle net AUGND: 563.5,-3592.06 659.48,-3488
  rectangle net AUGND: 599.48,-3695 654.48,-3578
  rectangle net USB_OTG_VBUS: 4383.48,-392 4528.48,-339
  rectangle net GND: 3178.48,-565 3408.48,-495
  rectangle net GND: 3403.48,-561 3511.48,-525
  rectangle net GND: 4238.48,-278 4289.48,-253
  rectangle net GND: 4226.48,-301 4265.48,-253
  rectangle net GND: 2201.48,-3444 2271.48,-3232
  rectangle net GND: 2262.48,-3444 2336.48,-3293
  rectangle net GND: 2193.48,-3502 2284.48,-3426
  rectangle net VCC5V: 5260.48,-1500 5374.48,-1438
  rectangle net VCC5V: 1903.8,-1033 2003.48,-658
  pour cut-out: 4160,-1880 4460,-1880 4460,-2340 4440,-2360 4220,-2360
Bottom Layer:
  rectangle net EARTH: 1783.48,-3815 1883.48,-3680
  rectangle net GND: 4668.48,-1820 4868.48,-1615
  rectangle net EARTH: 4678.48,-4260 5758.48,-3940
  rectangle net AUGND: 936.48,-2947 1313.48,-2615
  rectangle net GND: -54.52,-3689 357.48,-3215
  rectangle net NetP5_6: 62.48,-3763 89.48,-3728
  rectangle net NetP5_5: 25.48,-3763 55.48,-3728
GND (plane layer: these items are gaps in the copper):
  lines w18: 214.48,-3738 254.48,-3778 1679.48,-3778 1834.48,-3623 1834.48,-2395.2 1767.28,-2328 659.48,-2328 614.48,-2373 614.48,-2843 574.48,-2883 234.48,-2883 214.48,-2903 214.48,-3738
VCC (plane layer: these items are gaps in the copper):
  lines w18: 2586.48,-2963 2596.48,-2963 2708.48,-3075 2938.48,-3075 2996.48,-3133 5574.48,-3133 5611.48,-3170 5611.48,-3404 5570.48,-3445 3014.48,-3445 2980.48,-3411 600.48,-3411 560.48,-3451 415.48,-3451 369.48,-3405 369.48,-3019.93 426.41,-2963 2587.48,-2963 ; 5494.48,-1698 5494.48,-566 5253.48,-325 3583.48,-325 3568.48,-340 3568.48,-455 3548.48,-475 3383.48,-475 3358.48,-450 3358.48,-310 3343.48,-295 3183.48,-295 2958.48,-520 1898.48,-520 1862.48,-556 1862.48,-1009 1883.48,-1030 2143.48,-1030 2435.48,-738 3209.48,-738 5105.48,-738 5171.48,-804 5171.48,-1815 5136.48,-1850 4151.48,-1850 4118.48,-1883 4118.48,-2578 4067.48,-2629 3050.48,-2629 3004.48,-2675 3004.48,-2961 3069.48,-3026 4633.48,-3026 5066.48,-3026 5120.48,-3080 5278.48,-3080 5308.48,-3050 5308.48,-2494 5495.48,-2307 5495.48,-1864 5495.48,-1689 5494.48,-1688

## Silkscreen, mask and mechanical layers (free items; w line width, h text height)
Top Overlay:
  lines w5: 5398.48,-1370 5398.48,-1355 ; 4252.48,-465 4252.48,-320 4773.48,-320 4773.48,-465 4252.48,-465
  lines w6: 1904.95,-828 1832,-828 1832,-753 1904.95,-753 ; 5408.48,-1470 5533.48,-1470 5533.48,-1150 5408.48,-1150 5408.48,-1470
  lines w8: 5348.48,-105 5873.48,-105 ; 5348.48,45 5873.48,45 ; 5528.48,-165 5528.48,-40 ; 5528.48,-15 5528.48,110 ; 5698.48,-170 5698.48,-40 ; 5698.48,-20 5698.48,110 ; 5348.48,-170 5348.48,-40 5873.48,-40 5873.48,-170 5348.48,-170 ; 5348.48,-20 5873.48,-20 5873.48,110 5348.48,110 5348.48,-20
  lines w10: 4439.8,-593.87 1802,-593.87 ccw(c1802,-731.66) 1664.2,-731.66 1664.2,-2582.06 ccw(c1802,-2582.06) 1802,-2719.85 4439.8,-2719.85 ccw(c4439.8,-2582.06) 4577.59,-2582.06 4577.59,-731.66 ; 4440,-593.87 cw(c4440,-731.66) 4577.8,-731.66
  text "G5-30" at 5367,57 h60
  text "G6-00" at 5542,57 h60
  text "G6-01" at 5712,57 h60
  text "G5-26" at 5367,-8 h60
  text "GND" at 5552,-8 h60
  text "G5-31" at 5712,-8 h60
  text "TF" at 4035,-15 h60 r90
  text "U4-TX" at 5367,-93 h60
  text "U5-TX" at 5542,-93 h60
  text "U5-RX" at 5712,-93 h60
  text "3.3" at 3167,-158 h60 r90
  text "G5-26" at 5367,-158 h60
  text "GND" at 5552,-158 h60
  text "U4-RX" at 5712,-158 h60
  text "LVDS" at 1783.48,-290 h60 r90
  text "5.0" at 3167,-338 h60 r90
  text "RED" at 2938.48,-370 h60 r180
  text "COM0" at 5579,-419 h60 r90
  text "MINI-PCIE" at 514.48,-883 h60
  text "1" at 1853.48,-920 h78.74
  text "RST" at 4708.48,-1020 h60
  text "3.3V" at 4598.48,-1490 h60
  text "BAT" at 2890.48,-1636 h60 r90
  text "+5V" at 5473.48,-1665 h60
  text "SIM" at 2528.48,-1800 h60 r270
  text "DC-IN" at 5625,-2310 h40 r90
  text "CAN" at 5556,-2385 h40
  text "1" at 1763.48,-2645 h78.74
  text "485" at 5350,-3190 h50
  text "ETH0" at 3618.48,-3400 h60
  text "+12V" at 5503.48,-3420 h60 r90
  text "GND" at 5503.48,-3570 h60 r90
  text "COM1" at 4518.48,-3660 h60
  text "DC-IN" at 5893.48,-3755 h60
  text "B-LIGHT" at 69.48,-4023 h40
  text "L-SPK" at 1119.48,-4028 h40 r90
  text "R-SPK" at 1689.48,-4028 h40 r90
Bottom Overlay:
  lines w8: 5723.48,-2965 6123.48,-2965 ; 5723.48,-2560 6123.48,-2560 ; 5923.48,-3065 5923.48,-2870 ; 5923.48,-2660 5923.48,-2465 ; 5723.48,-3065 5723.48,-2865 6123.48,-2865 6123.48,-3065 5723.48,-3065 ; 5723.48,-2660 6123.48,-2660 6123.48,-2460 5723.48,-2460 5723.48,-2660
  text "RMXX Smart cabinet V1.3" at 133.48,-345 h250 r90
  text "CAN-N" at 5908.48,-2530 h60
  text "VIN" at 6073.48,-2530 h60
  text "GND" at 5873.48,-2630 h60
  text "CAN-N" at 6103.48,-2630 h60
  text "485-B" at 5893.48,-2935 h60
  text "VIN" at 6068.48,-2935 h60
  text "GND" at 5873.48,-3035 h60
  text "485-A" at 6093.48,-3035 h60
Top Solder:
  rectangle: 1478.48,-1305 1648.48,-645

## Text inside footprints (layer, text, board x,y; h text height)
J3: Top Overlay "9" at 5744.48,-507.67 h30 r270; Top Overlay "5" at 5644.48,-487.67 h30 r270; Top Overlay "1" at 5644.48,-1087.67 h30 r270; Top Overlay "6" at 5744.48,-1067.67 h30 r270
J6: Top Overlay "6" at 4867.81,-3818 h30 r180; Top Overlay "1" at 4847.81,-3718 h30 r180; Top Overlay "5" at 5447.81,-3718 h30 r180; Top Overlay "9" at 5427.81,-3818 h30 r180
J9: Top Overlay "V" at 4462.48,-291 h30; Top Overlay "G" at 4201.48,-291 h30
J21: Top Overlay "1" at 386.6,-2243.28 h40 r90
U3: Top Overlay "1" at 4083.48,-1795 h25.59 r270
U5: Top Overlay "1" at 4625.39,-3412.76 h30
U7: Top Overlay "1" at 4581.06,-2623.23 h25.59 r270
U8: Top Overlay "1" at 5334.24,-1097.09 h30 r90
U25: Top Overlay "1" at 2399.06,-1419 h30 r90